# Altium PCB mini_plata.PcbDoc
Units mm, origin at the board's own origin, x right, y up, seen from the top; angles counter-clockwise.
Board outline 33 x 36 mm, 4 copper layers (Top Layer, Power, Ground, Bottom Layer), stack 1.486 mm thick; 73 components, 60 nets, 234 pads, 119 vias.
Unrouted connection lines stored in the file: 1.
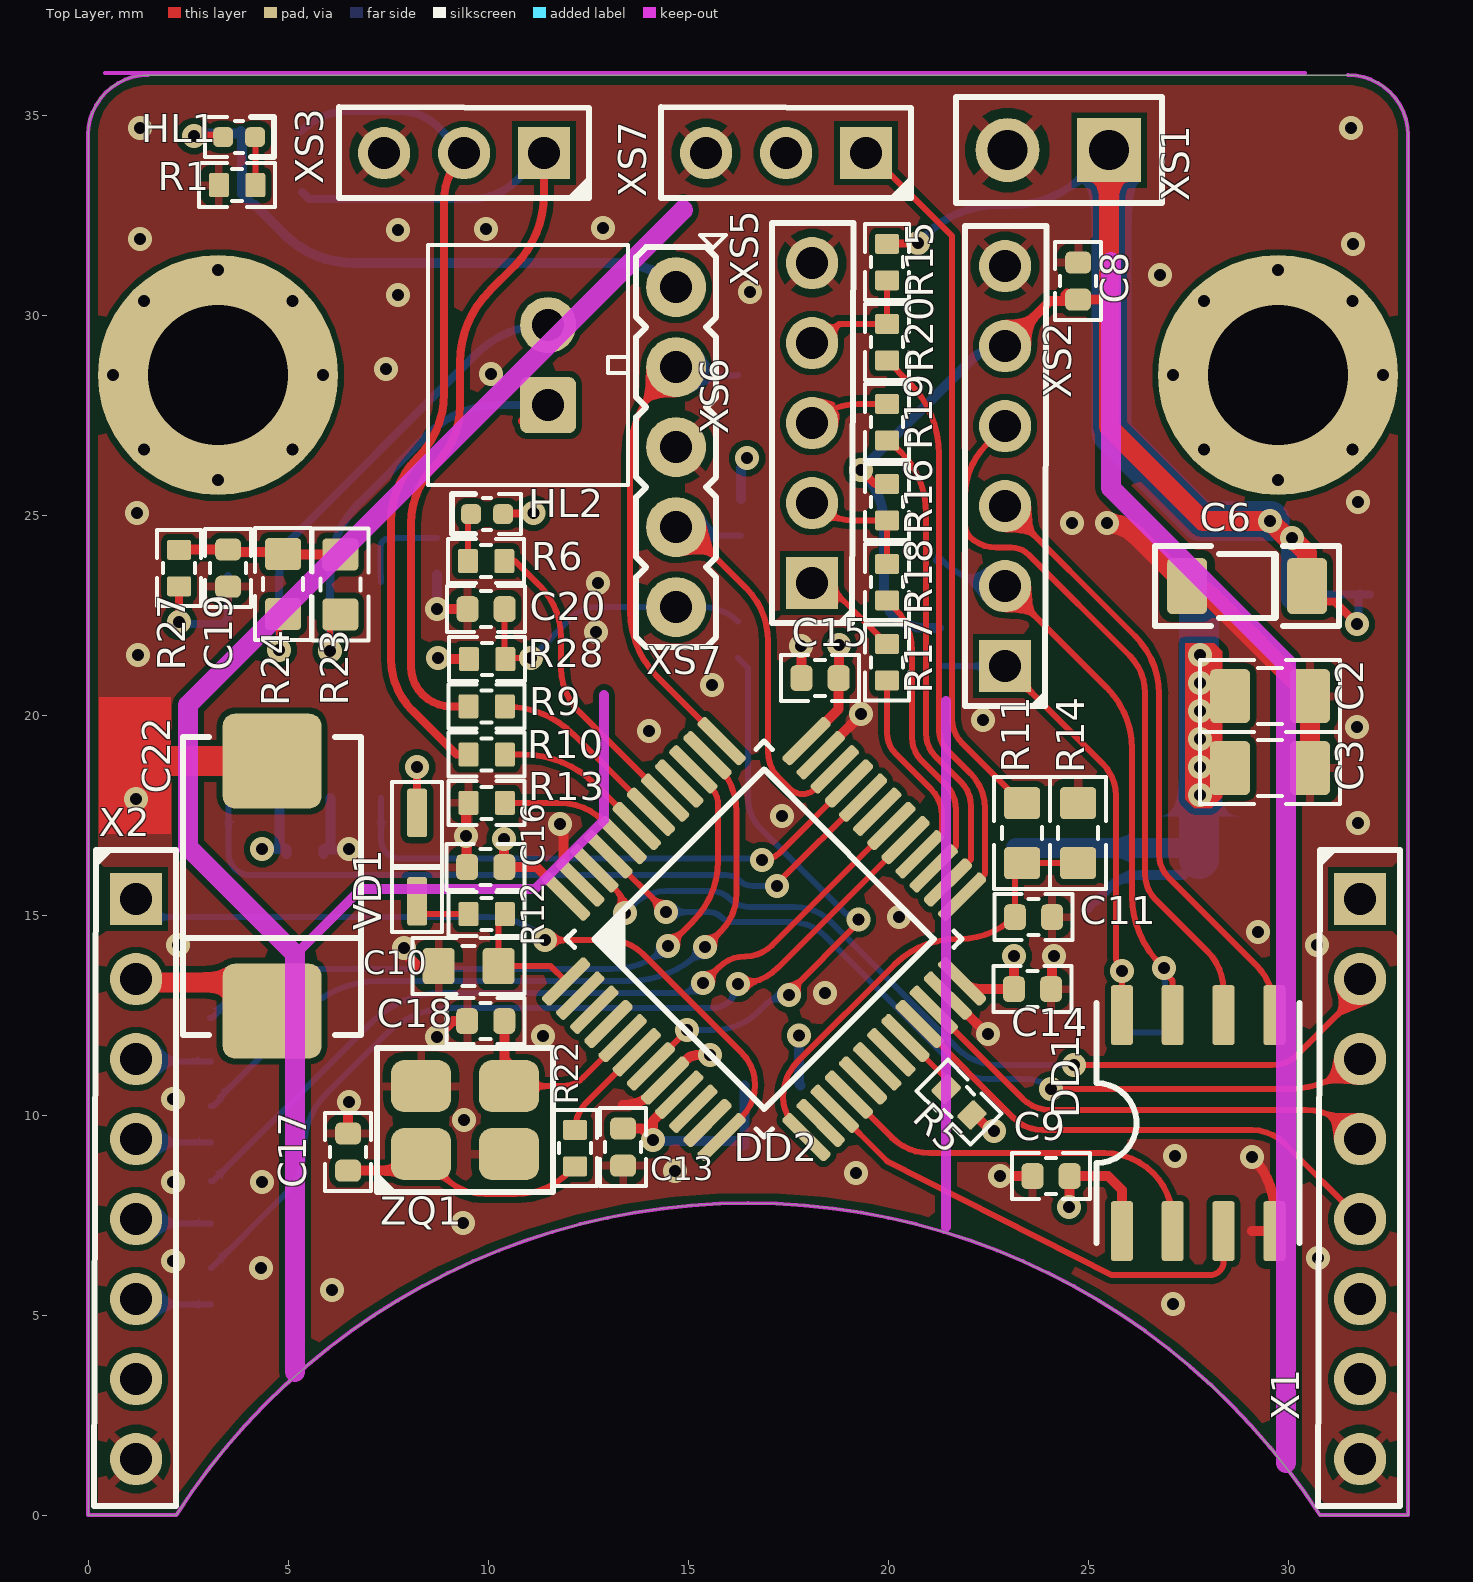
[diagram p0: Top Layer view]
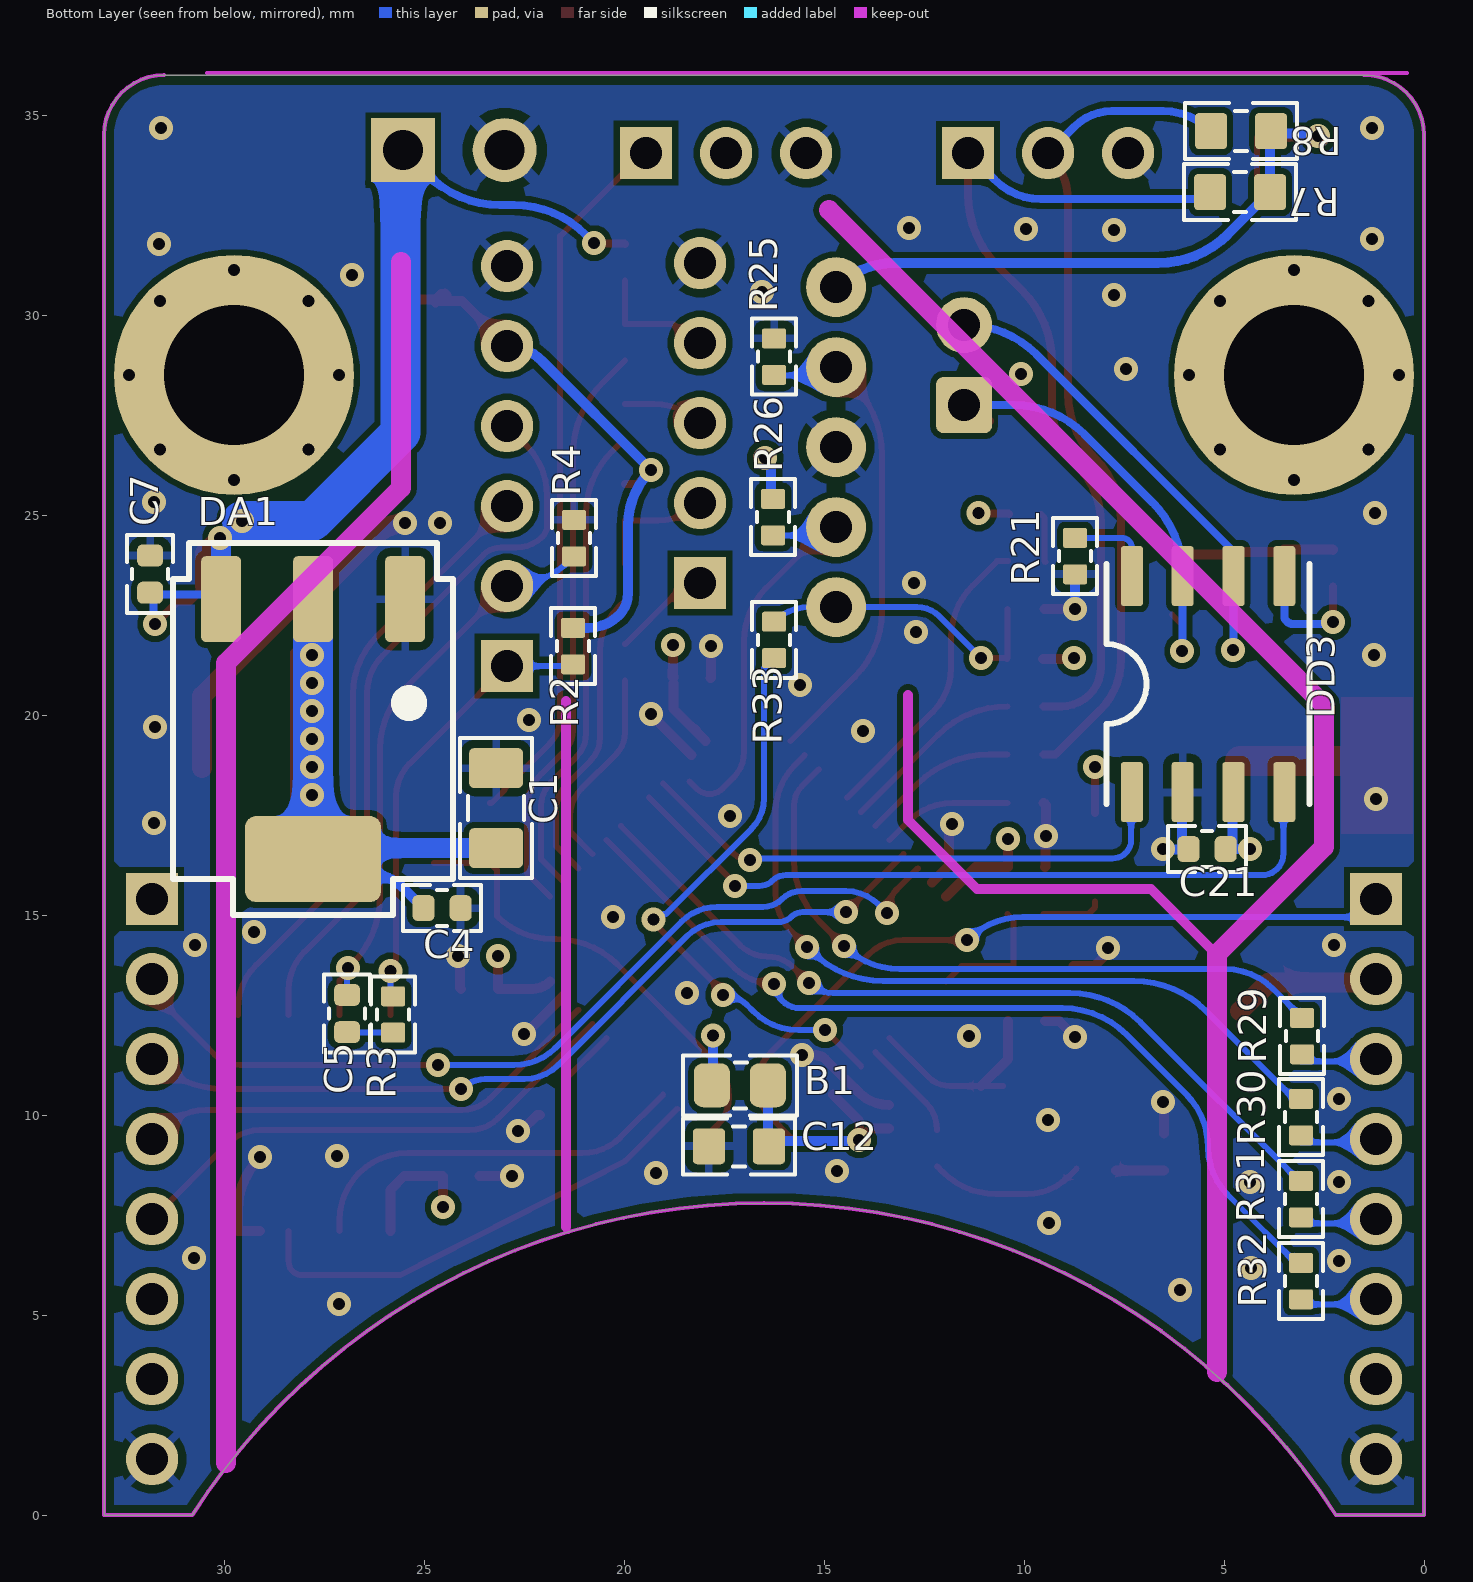
[diagram p1: Bottom Layer view, seen from below]
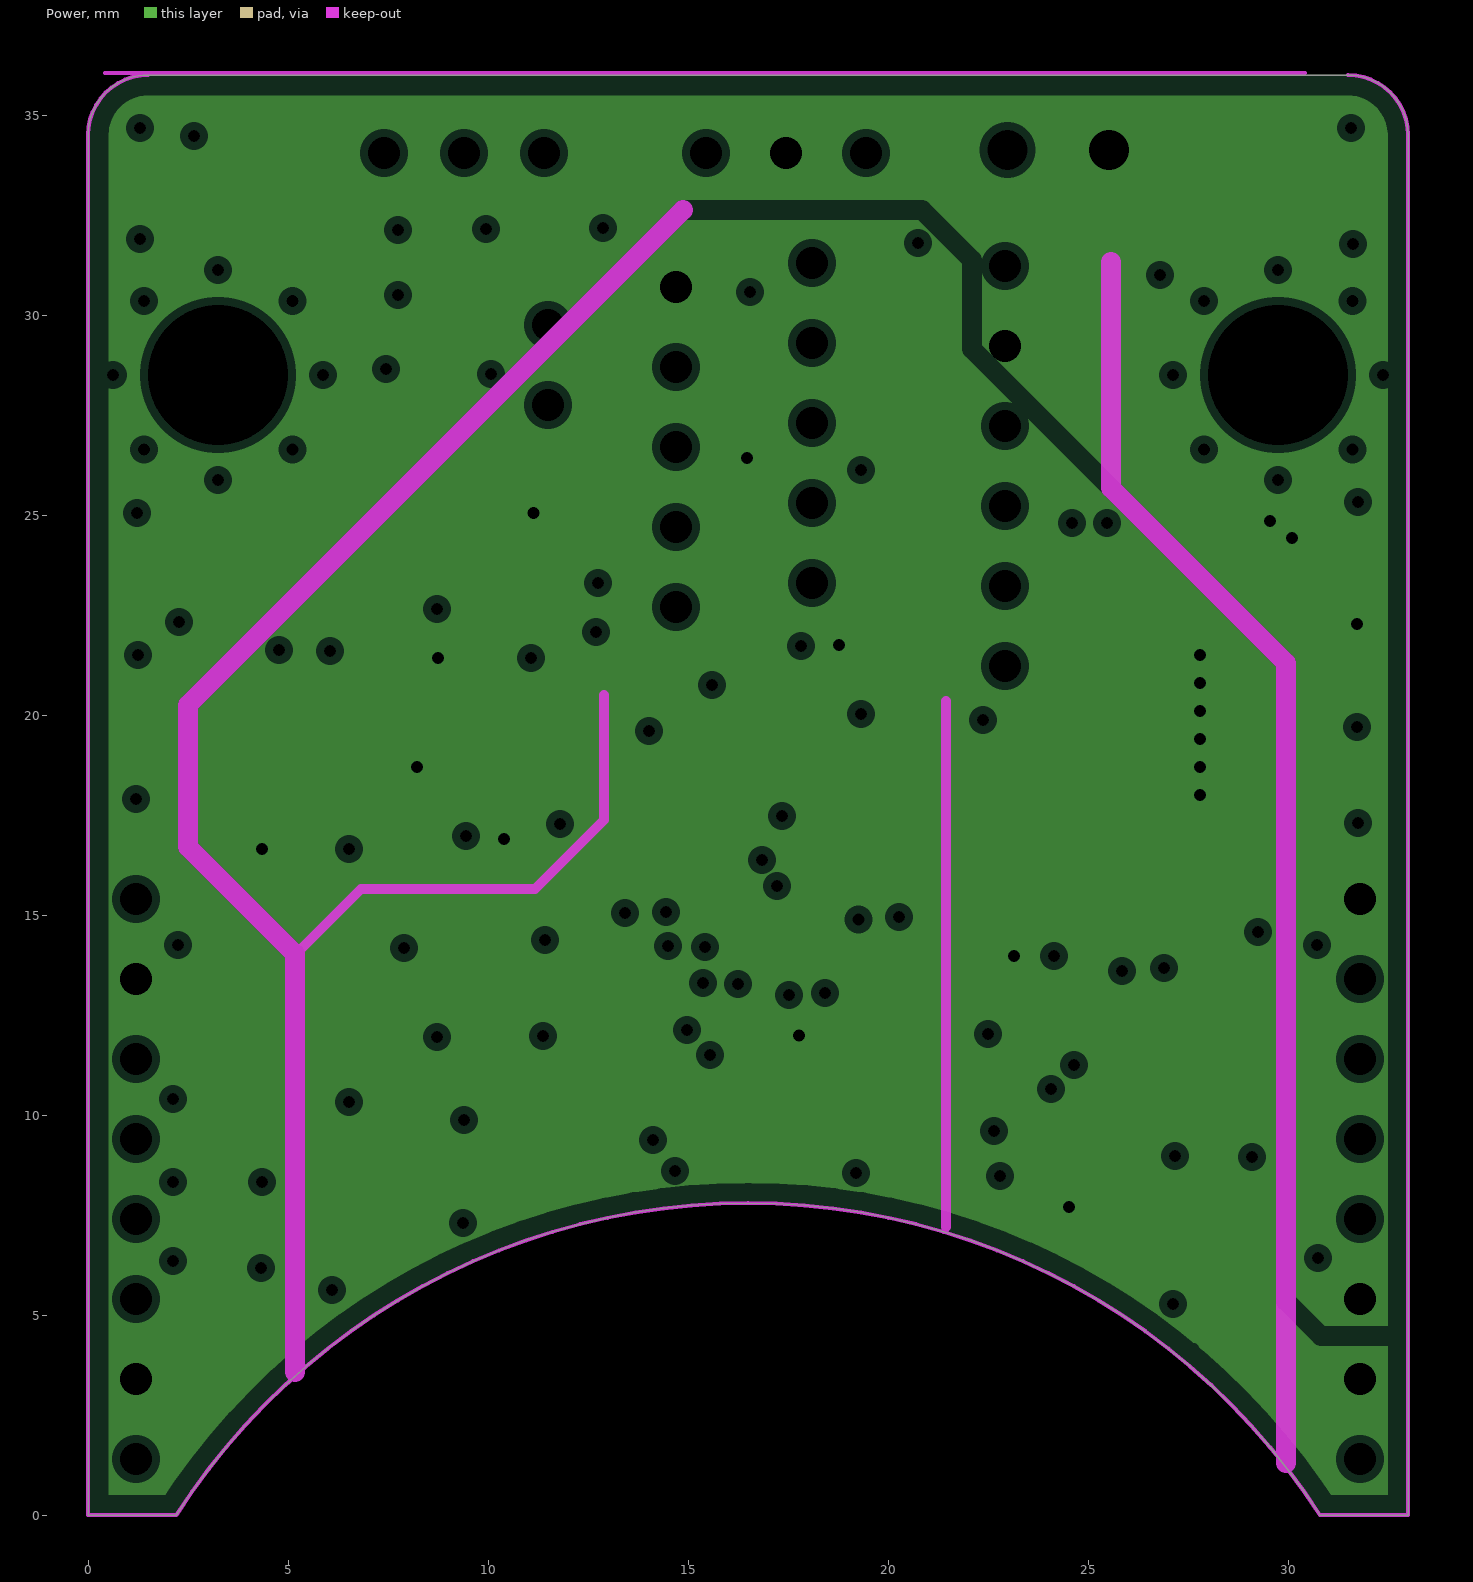
[diagram p2: Power, clearances drawn from the general rule]
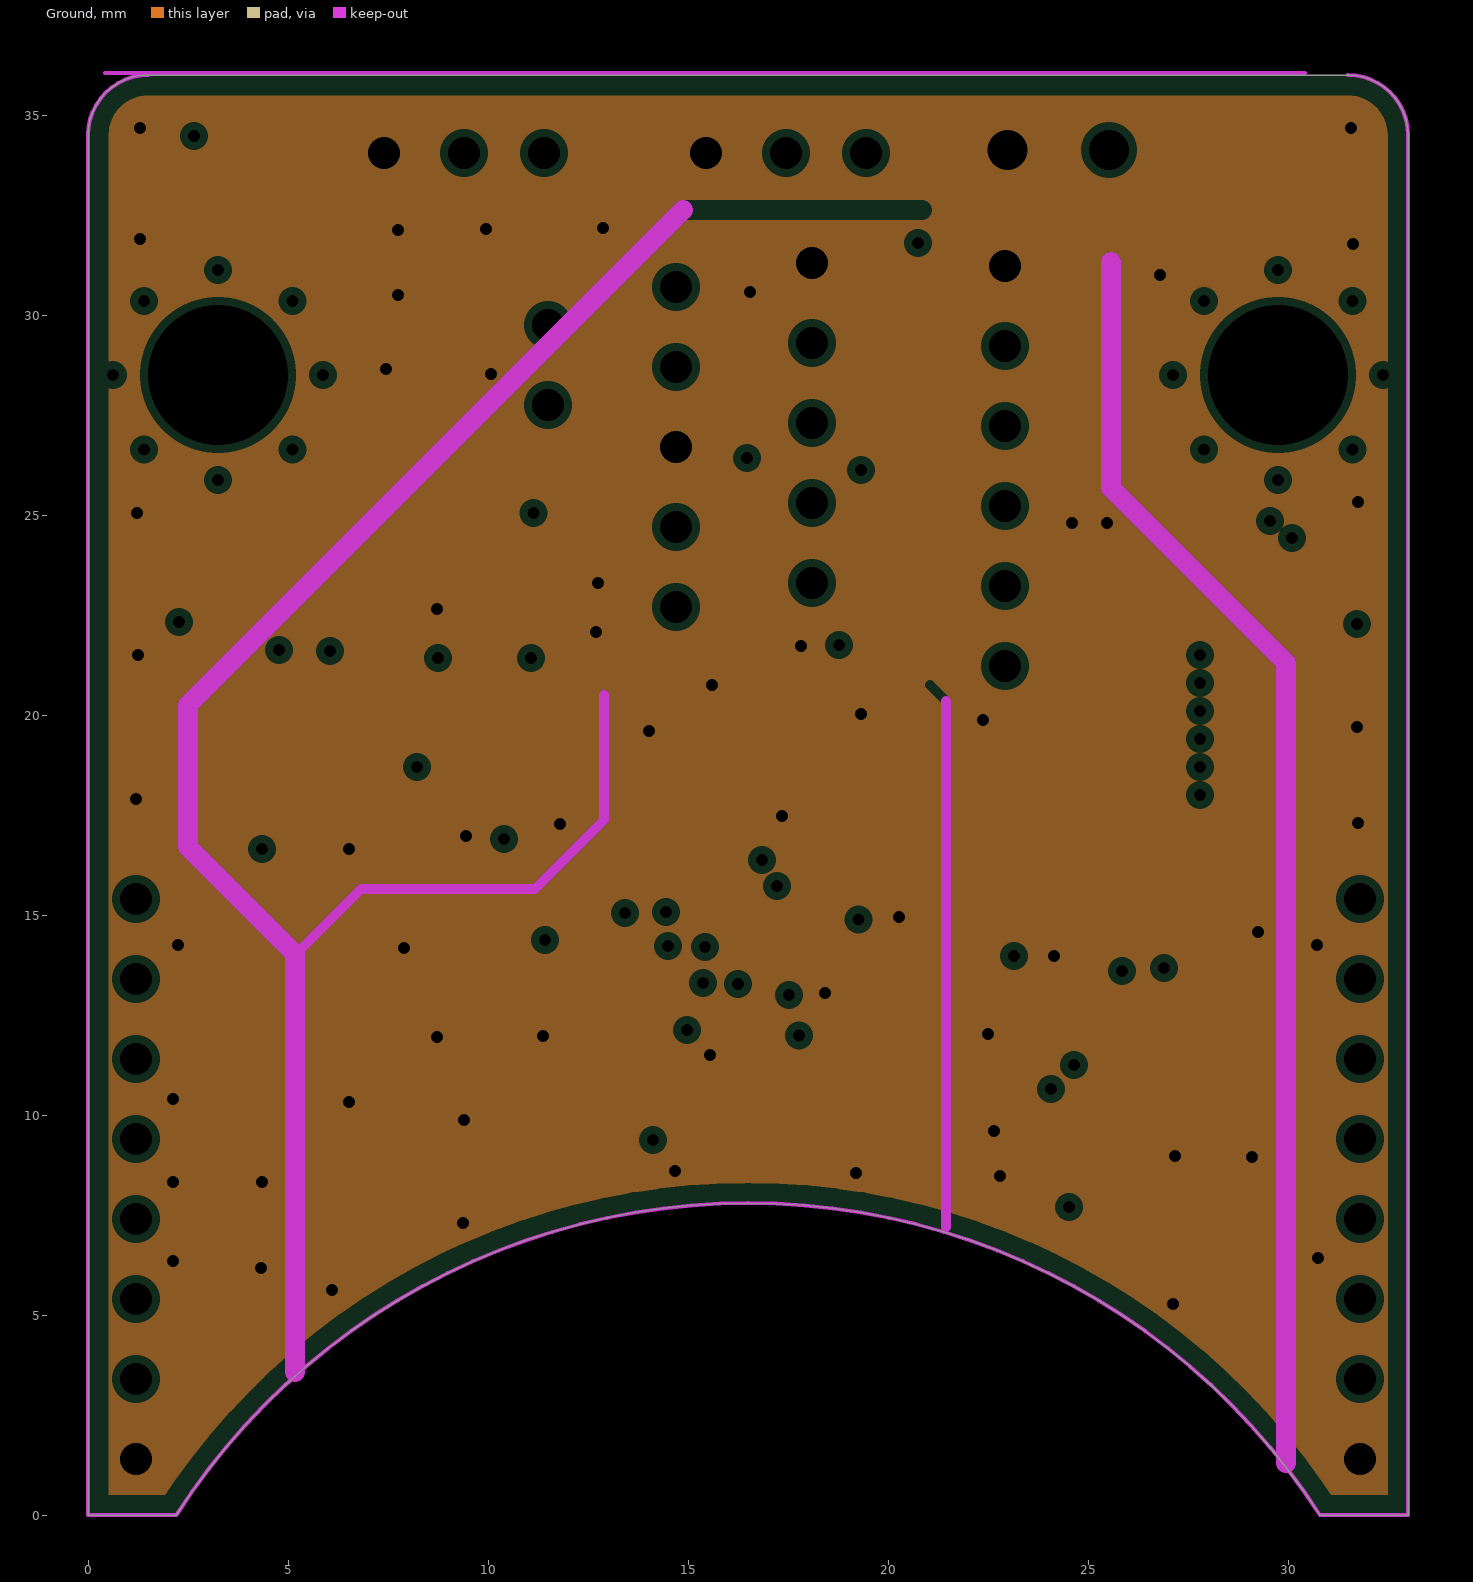
[diagram p3: Ground, clearances drawn from the general rule]
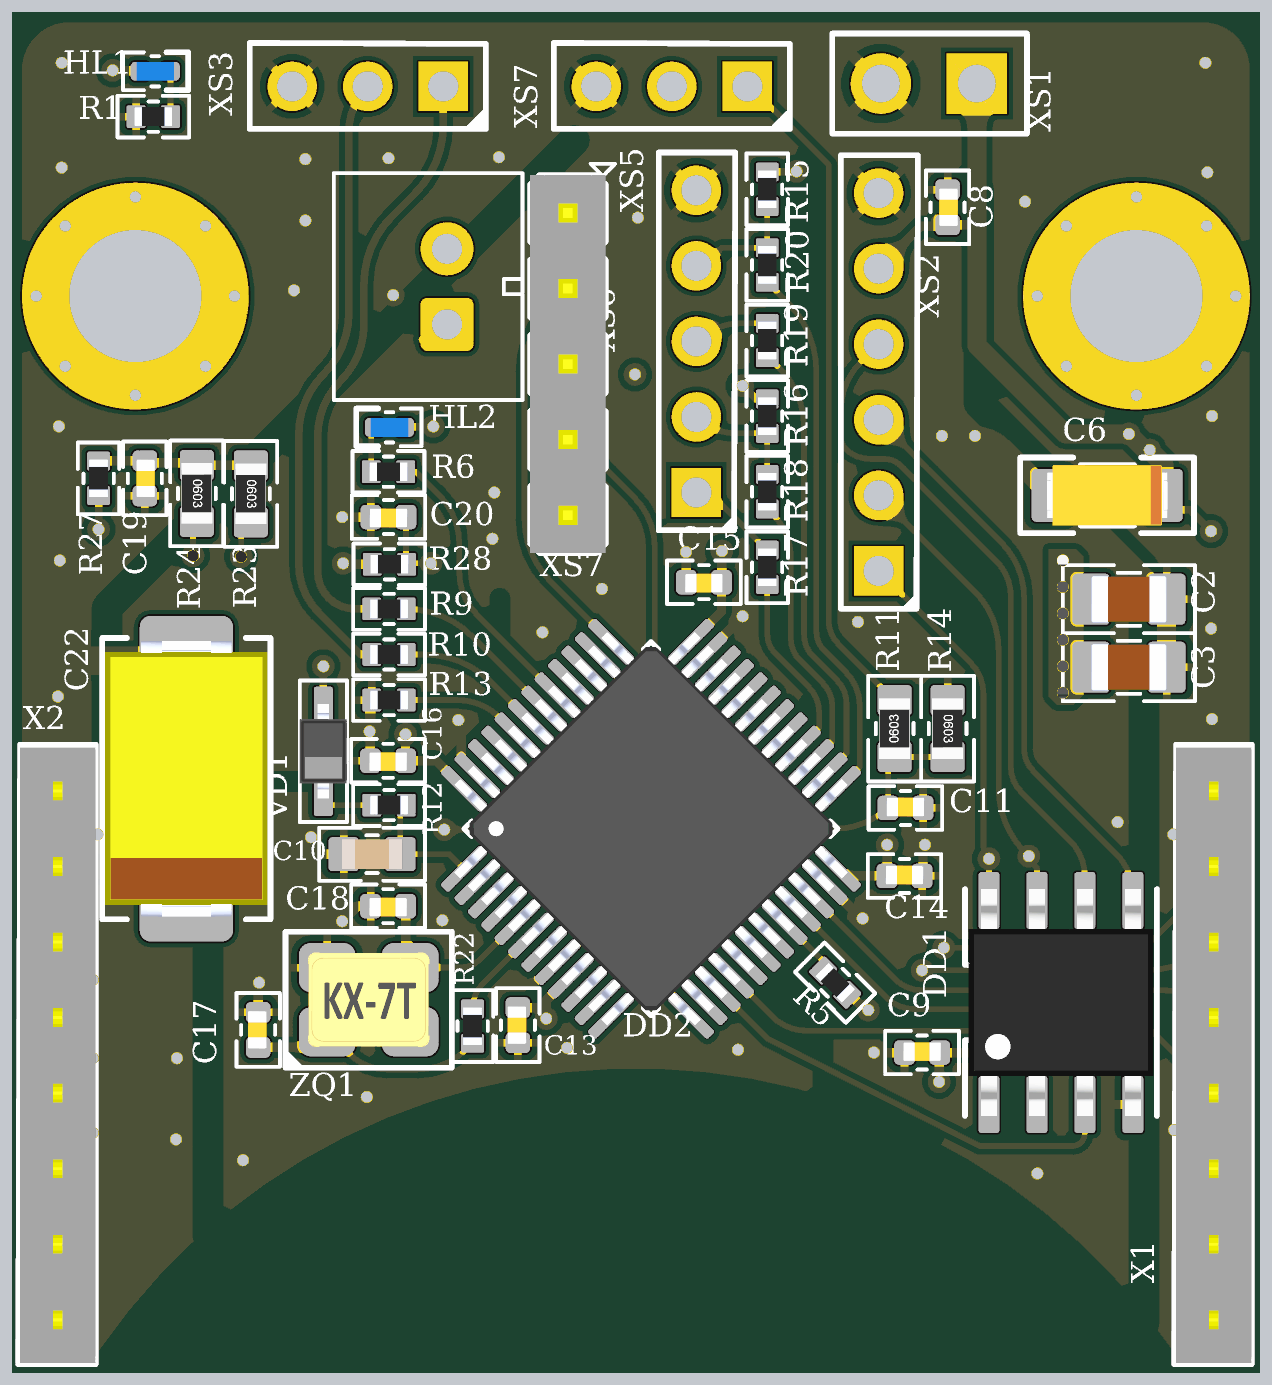
[diagram p4: 3D render of the assembled board from above, using the file's embedded part models]
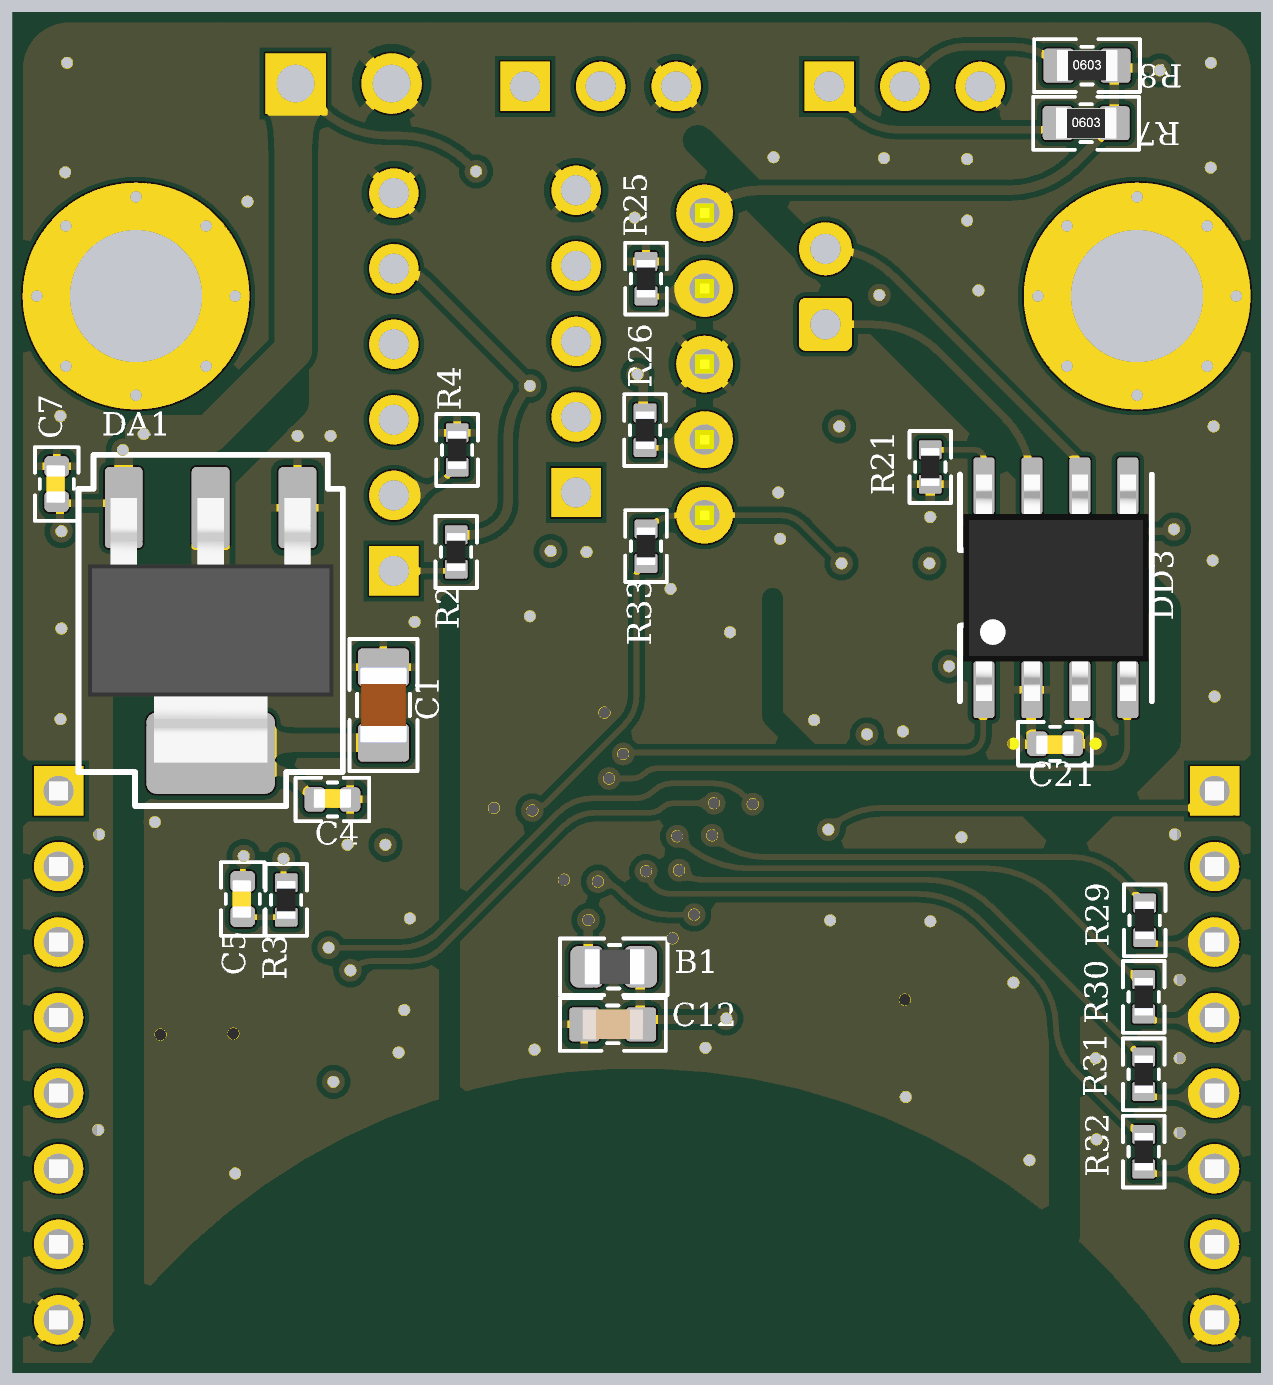
[diagram p5: 3D render of the assembled board from below, using the file's embedded part models]

## Layer stack, top to bottom
Top Solder: solder mask 0.01, Solder Resist, Dk 3.5
Top Layer: signal copper 0.018
Dielectric 2: prepreg 0.125, PP-006, Dk 4.1
Power: plane copper 0.018, net (Multiple Nets)
Dielectric 1: dielectric 1.164, FR-4, Dk 4.8
Ground: plane copper 0.018, net GND
Dielectric 3: prepreg 0.125, PP-006, Dk 4.1
Bottom Layer: signal copper 0.018
Bottom Solder: solder mask 0.01, Solder Resist, Dk 3.5

## Board outline
0,0 0,34.5 cw(c1.5,34.5) 1.5,36 31.5,36 cw(c31.5,34.5) 33,34.5 33,0 30.8,0 30.797,-0.002 ccw(c16.5,-9.2) 2.203,-0.002 2.2,0

## Design rules (kind name [scope] priority, off if disabled: settings)
AcuteAngle [All] p1: minimum=3.50000000000000E+0001 checktracksonly=FALSE
BoardOutlineClearance [All] p1: gap=0.25 ignorepadtopadclearanceinfootprint=FALSE except(0: Arc-SplitContinuation Track-SplitContinuation SMDPad-SplitContinuation THPad-SplitContinuation Via-SplitContinuation Fill-SplitContinuation Poly-SplitContinuation Region-SplitContinuation Text-SplitContinuation)
Clearance Clearance_KeepOutLayer [OnLayer('Keep-Out Layer') vs InNet('No Net')] p1: gap=0.25 ignorepadtopadclearanceinfootprint=FALSE
Clearance [All] p2: gap=0.15 ignorepadtopadclearanceinfootprint=FALSE except(0.2: Arc-Hole Track-Hole SMDPad-Hole THPad-Hole Via-Hole Fill-Hole Poly-Hole Region-Hole Text-Hole)
ComponentClearance [All] p1: gap=0.2 collisioncheckmode=3 verticalgap=0.2 showdistances=FALSE
HoleSize "HoleSize VIA" [IsVia] p1: absolutevalues=TRUE maxlimit=5.9 minlimit=0.3 maxpercent=80.000 minpercent=20.000
HoleSize [IsPad] p2: absolutevalues=TRUE maxlimit=5.9 minlimit=0.6 maxpercent=80.000 minpercent=20.000
HoleToHoleClearance [All] p1: gap=0.25 allowstackedmicrovias=TRUE
MinimumAnnularRing "MinimumAnnularRing VIA" [All] p1: minimumring=0.15
MinimumAnnularRing "MinimumAnnularRing PAD" [IsPAD] p2: minimumring=0.2
MinimumSolderMaskSliver [All] p1: minsoldermaskwidth=0.1
PlaneClearance [All] p1: clearance=0.2
PlaneConnect [All] p1: pad.planeconnectstyle=Relief pad.reliefexpansion=0.2 pad.reliefentries=4 pad.reliefconductorwidth=0.2 pad.reliefairgap=0.2 via.planeconnectstyle=Direct via.reliefexpansion=0.2 via.reliefentries=4 via.reliefconductorwidth=0.2 via.reliefairgap=0.2
PolygonConnect PolygonConnect_Via [IsVia] p1: connectstyle=Direct reliefconductorwidth=0.254 reliefentries=4 polygonreliefangle="90 Angle" airgapwidth=0.254
PolygonConnect [All] p2: thpad.connectstyle=Relief thpad.reliefconductorwidth=0.2 thpad.reliefentries=4 thpad.polygonreliefangle="45 Angle" thpad.airgapwidth=0.2 smdpad.connectstyle=Relief smdpad.reliefconductorwidth=0.2 smdpad.reliefentries=4 smdpad.polygonreliefangle="90 Angle" smdpad.airgapwidth=0.2 via.connectstyle=Direct via.reliefconductorwidth=0.25 via.reliefentries=4 via.polygonreliefangle="90 Angle" via.airgapwidth=0.25
RoutingVias [All] p1: holewidth=0.3 width=0.6 viastyle="Through Hole" minholewidth=0.2 minwidth=0.4 maxholewidth=5.9 maxwidth=6.4
SilkToSilkClearance [All] p1: silktosilkclearance=0
SilkToSolderMaskClearance [IsPad] p1: minsilkscreentomaskgap=0 clearancetoexposedcopper=TRUE
SolderMaskExpansion [All] p1: expansion=0.05 istentingtop=FALSE
Width [All] p1: maxlimit=5 minlimit=0.15 preferedwidth=0.15
22 further rules are at their usual default settings.

## Components (designator, comment, footprint, x,y, rotation, side; value= is the part's Value field where it differs from the comment)
B1 "BLM18PG181SN1D" Ferrite_Bead_0603 17.105,10.745 r180 bottom
C1 "22u" 0805_cap 23.2,17.675 r90 bottom
C2 "22u" 0805_cap 29.55,20.475 r0 top
C3 "10u" 0805_cap 29.55,18.675 r0 top
C4 "0.1u" 0402_CAP 24.55,15.175 r180 bottom
C5 "1.8n" 0402_CAP 26.925,12.54 r90 bottom
C6 "22Ux16V" "CASE A" 28.975,23.225 r180 top
C7 "0.1u" 0402_CAP 31.85,23.525 r90 bottom
C8 "2.2u" 0402_CAP 24.75,30.85 r270 top
C9 "0.1u" 0402_CAP 24.075,8.475 r0 top
C10 "2.2u" 0603_CAP 9.515,13.725 r180 top
C11 "0.1u" 0402_CAP 23.635,14.95 r0 top
C12 "4.7u" 0603_CAP 17.13,9.22 r180 bottom
C13 "0.1u" 0402_CAP 13.375,9.2 r90 top
C14 "0.1u" 0402_CAP 23.61,13.15 r0 top
C15 "0.1u" 0402_CAP 18.3,20.925 r180 top
C16 "0.1u" 0402_CAP 9.94,16.2 r180 top
C17 "18p" 0402_CAP 6.5,9.075 r90 top
C18 "18p" 0402_CAP 9.94,12.35 r180 top
C19 "4700p" 0402_CAP 3.5,23.675 r270 top
C20 "100n" 0402_CAP 9.95,22.65 r180 top
C21 "0.1u" 0402_CAP 5.425,16.65 r0 bottom
C22 "22x35" "CASE D" 4.6,15.725 r90 top
DA1 "1117M3-L-3-3" "SOT-223 (3)" 27.775,19.4 r270 bottom
DD1 "MAX3490EESA" SOIC-8 27.75,9.8 r90 top
DD2 "GD32F303C" LQFP-48 16.9,14.4 r45 top
DD3 "SN65HVD230DR" SOIC-8 5.4,20.775 r90 bottom
HL1 "Зелёный" 0402_LED_GREEN 3.775,34.45 r0 top
HL2 "Зелёный" 0402_LED_GREEN 9.975,25.025 r180 top
R1 "470" 0402_res 3.725,33.25 r0 top
R2 "5k1" 0402_res 21.275,21.725 r270 bottom
R3 "120" 0402_res 25.775,12.515 r90 bottom
R4 "5k1" 0402_res 21.25,24.425 r90 bottom
R5 "10k" 0402_res 21.775,10.325 r315 top
R6 "470" 0402_res 9.95,23.85 r180 top
R7 "2к2" 0603_RES 4.6,33.075 r180 bottom
R8 "2к2" 0603_RES 4.575,34.6 r180 bottom
R9 "22" 0402_res 9.965,20.219 r0 top
R10 "22" 0402_res 9.965,19.012 r0 top
R11 "18k" 0603_RES 23.35,17.05 r90 top
R12 "220" 0402_res 9.965,15.025 r180 top
R13 "10k" 0402_res 9.965,17.806 r180 top
R14 "10k" 0603_RES 24.75,17.05 r270 top
R15 "5k1" 0402_res 19.975,31.325 r90 top
R16 "5k1" 0402_res 19.975,25.322 r90 top
R17 "22" 0402_res 19.975,21.32 r90 top
R18 "22" 0402_res 19.975,23.321 r90 top
R19 "22" 0402_res 19.975,27.323 r90 top
R20 "22" 0402_res 19.975,29.324 r270 top
R21 "10k" 0402_res 8.725,23.975 r270 bottom
R22 "220" 0402_res 12.175,9.175 r90 top
R23 "62" 0603_RES 6.305,23.265 r270 top
R24 "62" 0603_RES 4.875,23.275 r270 top
R25 "10k" 0402_res 16.25,28.96 r90 bottom
R26 "10k" 0402_res 16.275,24.95 r90 bottom
R27 "0" 0402_res 2.275,23.675 r270 top
R28 "10k" 0402_res 9.975,21.4 r180 top
R29 "22" 0402_res 3.05,11.975 r90 bottom
R30 "22" 0402_res 3.075,9.95 r90 bottom
R31 "22" 0402_res 3.075,7.9 r90 bottom
R32 "22" 0402_res 3.075,5.85 r90 bottom
R33 "220" 0402_res 16.25,21.88 r90 bottom
VD1 "BAT60B" SOD-323 8.225,16.45 r90 top
X1 "PBD-8" PBD_8_2mm 31.8,8.4 r270 top
X2 "PBD-8" PBD_8_2mm 1.2,8.4 r270 top
XS1 "power_5v" "STEP_2.54mm 2X1" 25.525,34.125 r270 top
XS2 "SSI" PH6_2mm 22.925,24.225 r90 top
XS3 "I2C or UART" PH3_2mm 9.4,34.05 r180 top
XS5 "SPI" PH5_2mm 18.1,26.3 r90 top
XS6 "CAN" MW-2M 11.5,27.75 r90 top
XS7 "POT" PH3_2mm 17.45,34.05 r180 top
XS7 "SWD" jumper_5pin_step2mm 14.7,26.7 r270 top
ZQ1 "8Mhz" KX-7T 9.425,9.875 r0 top

## Footprints (in the part's own frame and the unit in brackets; to place one, negate y for a bottom-side part, rotate by r counter-clockwise, add the part's x,y. Pads: shape width x height; smd on the part's side, far side on the other; paste and mask are expansions set on the pad)
0402_CAP [mm]
  rrect50% 0.55x0.65 smd: 1(-0.465,0) 2(0.465,0)
  silkscreen extent -0.97,-0.58 0.97,0.58, body extent -0.5,-0.22 0.5,0.28, height 0.5
0402_LED_GREEN [mm]
  rrect50% 0.5x0.5 smd: A(-0.4,0) K(0.4,0)
  silkscreen extent -0.85,-0.5 0.87,0.5, body extent -0.5,-0.25 0.5,0.25, height 0.4
0402_res [mm]
  rrect20% 0.5x0.6 smd: 1(-0.455,0) 2(0.455,0)
  silkscreen extent -0.95,-0.55 0.95,0.55, body extent -0.5,-0.25 0.5,0.25, height 0.35
0603_CAP [mm]
  rrect25% 0.8x0.9 smd: 1(-0.75,0) 2(0.75,0)
  silkscreen extent -1.4,-0.7 1.4,0.7, body extent -0.8,-0.4 0.8,0.4, height 0.8
0603_RES [mm]
  rrect25% 0.8x0.9 smd: 1(-0.75,0) 2(0.75,0)
  silkscreen extent -1.4,-0.7 1.4,0.7, body extent -0.8,-0.41 0.8,0.41, height 0.45
0805_cap [mm]
  rrect25% 1x1.35 smd: 1(-1,0) 2(1,0)
  silkscreen extent -1.75,-0.9 1.75,0.9, body extent -1,-0.62 1,0.63, height 1.45
"CASE A" [mm]
  rrect25% 1x1.4 smd: 1(-1.5,0) 2(1.5,0)
  silkscreen extent -2.3,-1 2.3,1, body extent -1.6,-0.8 1.6,0.8, height 1.6
"CASE D" [mm]
  rrect25% 2.37x2.47 smd: 1(-3.125,0) 2(3.125,0)
  silkscreen extent -3.72,-2.22 3.72,2.22, body extent -3.65,-2.15 3.65,2.15, height 3.1
Ferrite_Bead_0603 [mm]
  rrect50% 0.9x1.1 smd: 1(-0.7,0) 2(0.7,0)
  silkscreen extent -1.43,-0.75 1.43,0.75, body extent -0.77,-0.48 0.83,0.48, height 0.8
jumper_5pin_step2mm [mm]
  round 1.5 hole 0.8: 1(-4,0) 2(-2,0) 3(0,0) 4(2,0) 5(4,0)
  silkscreen extent -5,-1 5,1, body extent -5,-1 5,1, height 5.21
KX-7T [mm]
  rrect50% 1.5x1.3 smd: 1(-1.1,-0.85) 2(1.1,0.85) 3(-1.1,0.85) 3(1.1,-0.85)
  silkscreen extent -2.2,-1.8 2.2,1.8, body extent -1.61,-1.25 1.61,1.25, height 0.81
LQFP-48 [mm]
  rrect50% 1.5x0.3 smd mask+0.025: 1(-4.25,2.75) 2(-4.25,2.25) 3(-4.25,1.75) 4(-4.25,1.25) 5(-4.25,0.75) 6(-4.25,0.25) 7(-4.25,-0.25) 8(-4.25,-0.75) 9(-4.25,-1.25) 10(-4.25,-1.75) 11(-4.25,-2.25) 12(-4.25,-2.75) 25(4.25,-2.75) 26(4.25,-2.25) 27(4.25,-1.75) 28(4.25,-1.25) 29(4.25,-0.75) 30(4.25,-0.25) 31(4.25,0.25) 32(4.25,0.75) 33(4.25,1.25) 34(4.25,1.75) 35(4.25,2.25) 36(4.25,2.75)
  rrect50% 0.3x1.5 smd mask+0.025: 13(-2.75,-4.25) 14(-2.25,-4.25) 15(-1.75,-4.25) 16(-1.25,-4.25) 17(-0.75,-4.25) 18(-0.25,-4.25) 19(0.25,-4.25) 20(0.75,-4.25) 21(1.25,-4.25) 22(1.75,-4.25) 23(2.25,-4.25) 24(2.75,-4.25) 37(2.75,4.25) 38(2.25,4.25) 39(1.75,4.25) 40(1.25,4.25) 41(0.75,4.25) 42(0.25,4.25) 43(-0.25,4.25) 44(-0.75,4.25) 45(-1.25,4.25) 46(-1.75,4.25) 47(-2.25,4.25) 48(-2.75,4.25)
  silkscreen extent -3.5,-3.5 3.5,3.5, body extent -4.5,-4.5 4.5,4.5, height 1.6
MW-2M [mm]
  rrect25% 1.4x1.4 hole 0.8: 1(0,0)
  round 1.4 hole 0.8: 2(2,0)
  silkscreen extent -2,-2 4,3, body extent -2,-2 4,3, height 6
PBD_8_2mm [mm]
  rect 1.308x1.308 / inner round 1.308 / far side rect 1.308x1.308 hole 0.8: 1(-7,0)
  round 1.308 hole 0.8: 2(-5,0) 3(-3,0) 4(-1,0) 5(1,0) 6(3,0) 7(5,0) 8(7,0)
  silkscreen extent -8.23,-1.05 8.18,1, body extent -8.15,-1 8.15,1, height 6.35
PH3_2mm [mm]
  rect 1.308x1.308 / inner round 1.308 / far side rect 1.308x1.308 hole 0.8: 1(-2,0)
  round 1.308 hole 0.8: 2(0,0) 3(2,0)
  silkscreen extent -3.13,-1.15 3.13,1.13
PH5_2mm [mm]
  rect 1.308x1.308 / inner round 1.308 / far side rect 1.308x1.308 hole 0.8: 1(-3,0)
  round 1.308 hole 0.8: 2(-1,0) 3(1,0) 4(3,0) 5(5,0)
  silkscreen extent -4,-1.03 6,1
PH6_2mm [mm]
  rect 1.308x1.308 / inner round 1.308 / far side rect 1.308x1.308 hole 0.8: 1(-3,0)
  round 1.308 hole 0.8: 2(-1,0) 3(1,0) 4(3,0) 5(5,0) 6(7,0)
  silkscreen extent -4,-1.04 8,1
SOD-323 [mm]
  rrect25% 1.21x0.5 smd: A(1.105,0) K(-1.105,0)
  silkscreen extent -1.88,-0.63 1.88,0.63, body extent -1.25,-0.63 1.25,0.63, height 1.1
SOIC-8 [mm]
  rrect25% 1.5x0.55 smd: 1(-2.7,1.905) 2(-2.7,0.635) 3(-2.7,-0.635) 4(-2.7,-1.905) 5(2.7,-1.905) 6(2.7,-0.635) 7(2.7,0.635) 8(2.7,1.905)
  silkscreen extent -3,-2.54 3,2.54, body extent -3,-2.45 3,2.45, height 1.75
"SOT-223 (3)" [mm]
  rrect25% 2.15x1 smd: 1(-3.5,2.3) 2(-3.5,0) 3(-3.5,-2.3)
  rrect25% 2.15x3.4 smd: 2(3,0)
  silkscreen extent -4.9,-3.5 4.4,3.5, body extent -3.75,-3.25 3.25,3.25, height 1.64
"STEP_2.54mm 2X1" [mm]
  rect 1.6x1.6 hole 1: 1(0,0)
  round 1.6 hole 1: 2(0,-2.54)
  silkscreen extent -1.33,-3.83 1.33,1.33

## Part data
B1: library part "Ferrite Bead"
C1 C2 C3: library part Capacitor, Case=0805, ValueType=Конденсатор
C4 C5 C7 C8 C9 C11 C13 C14 C15 C16 C17 C18 C19 C20 C21: library part Capacitor, Case=0402, ValueType=Конденсатор
C6: library part Capacitor_pol, Case=TYPE(A), ValueType=Конденсатор
C10 C12: library part Capacitor, Case=0603, ValueType=Конденсатор
C22: library part Capacitor_pol, ValueType=Конденсатор
DD1: ValueManufacturer="Analog Devices", ComponentLink1Description=chipdip, ComponentLink1URL=https://www.chipdip.ru/product0/8002979238?ysclid=m3rd7su6kb974072814, NomenclatureNumber=8002979238
DD2: Case=LQFP-48, ValueDescription=Микроконтроллер, ValueManufacturer="Giga Device", ValueManufacturerPartNumber=GD32F303C, ValueType=Микроконтроллер
HL1 HL2: library part Led_green, Case=0603, Temp=-40°C...+85°C, ValueDescription=Светодиод, ValueManufacturer=Foryard, ValueManufacturerPartNumber=fyls-0603ugc, ValueType=Светодиод
R1 R6 R12 R17 R18 R19: library part Resistor, Power=0402, ValueType=Резистор
R2 R3 R4 R5 R9 R10 R13 R15 R16 R20 R21 R22 R25 R26 R27 R28 R29 R30 R31 R32 R33: library part Resistor, Case=0402, ValueType=Резистор
R7 R8 R11 R14 R23 R24: library part Resistor, Case=0603, ValueType=Резистор
VD1: library part DiodeSch_BAT60B, ValueManufacturer="NXP Semiconductors", ValueManufacturerPartNumber=BAT254
X1 X2: library part Connecor_8pin, Parameter 1=GND, System=Connector
  X1: Parameter 2=+3.3V, Parameter 3=+5V, Parameter 4=A_IN, Parameter 5=B_IN, Parameter 6=A_OUT, Parameter 7=B_OUT, Parameter 8=+5V
  X2: Parameter 2=+5V, Parameter 3=IN1, Parameter 4=IN2, Parameter 5=ENC_A, Parameter 6=ENC_B, Parameter 7=+5V, Parameter 8=AN_ASC
XS6: library part power_5v
XS7: library part "I2C or UART"
XS7: library part swd_JUMPER_5pin
ZQ1: library part Quartz, ValueType="Кварцевый резонатор"

## Free pads (board coordinates)
  round 6 hole 3.5 unplated: ""(3.25,28.5) ""(29.75,28.5)

## Via types
v1: diameter 0.6, hole 0.3, Top Layer to Bottom Layer, tented both sides, 103 vias
v2: diameter 0.7/0.7 (per signal layer), hole 0.3, Top Layer to Bottom Layer, tented both sides, 16 vias

## Nets (pads, with @x,y where several pads share a name; then routed paths per layer and width w, separated by ;. In a path a pad name is that pad's centre, name@x,y a point inside that pad or via, vN(x,y) a via of type N, cw(c..) or ccw(c..) an arc to the next point about the centre after c; other vN are vias at no path point)
3V3: B1.1 C1.1 C2.1 C3.1 C4.1 C9.2 C14.1 C15.1 C16.1 C21.1 DA1.2 DD1.1 DD2.24 DD2.36 DD2.48 DD3.3 HL1.A HL2.A R7.2 R8.2 R26.2 R28.2 VD1.A X1.7 XS7.1@14.7,30.7 | length 48.5
  Top Layer w0.2: VD1.A v1(8.225,18.7) ; HL2.A 10.388,25.037 11.123,25.037 v1(11.135,25.05)
  Top Layer w0.25: v1(2.65,34.475) 2.663,34.462 3.362,34.462 HL1.A ; v1(8.75,21.425) 8.775,21.4 R28.2 R28.2@9.522,21.398 ; v1(10.4,16.9) 10.4,16.205 C16.1 11.211,16.2 DD2.48 ; v1(16.475,26.425) v1@16.488,26.412 ; DD2.36@18.211,19.635 18.211,19.6 DD2.36 18.765,20.154 C15.1@18.765,20.793 ; C15.1@18.765,20.968 C15.1 18.775,20.935 v1(18.775,21.75) C15.1@18.775,21.125 ; C15.1@18.79,20.968 C15.1@18.79,21.125 ; DD2.24 ccw(c22.295,13.784) 22.295,13.155 23.15,13.155 v1(23.15,13.975) ; v1(24.525,7.7) 24.532,7.708 24.532,8.468 C9.2 25.5,8.475 25.845,8.13 DD1.1
  Bottom Layer w0.25: v1(2.65,34.475) 2.712,34.538 3.762,34.538 R8.2 ; R8.2@3.85,34.575 R7.2 3.85,33.025 4.125,32.75 4.175,32.75 4.9,32.025 ccw(c6.65,33.775) 6.65,31.3 13.251,31.3 cw(c13.251,29.251) 14.449,30.913 cw(c13.251,29.251) XS7.1@14.7,30.7 ; v1(4.35,16.65) C21.1 ; DD3.3@4.785,17.925 4.785,16.757 4.96,16.582 C21.1@4.96,16.525 ; R26.2@16.325,25.405 16.325,26.18 16.475,26.33 v1(16.475,26.425) ; v1(17.775,11.985) 17.775,10.817 ccw(c17.876,10.817) B1.1 ; C4.1 25.015,15.218 25.164,15.367 25.207,15.367 25.527,15.687 ; 25.527,15.687 cw(c26.298,14.915) 26.298,16.006 27.381,16.006 27.775,16.4 DA1.2@27.5,16.675
  Bottom Layer w0.5: C1.1 DA1.2@27.5,16.675
  Bottom Layer w1: DA1.2@27.775,16.4 DA1.2@27.775,22.9
  other v1: 27.8,18 27.8,18.7 27.8,19.4 27.8,20.1 27.8,20.8 27.8,21.5
+5V: C6.1 C7.1 C8.2 C22.1 DA1.3 R2.1 R15.2 R16.2 X1.1 X1.6 X2.2 X2.7 XS1.1 XS2.5 XS7.2@17.45,34.05 | length 58.9
  Top Layer w0.2: v1(19.325,26.125) 19.673,25.777 R16.2 ; R15.2 19.985,31.79 20.74,31.79 v1(20.75,31.8) ; C6.1 30.858,22.842 31.158,22.842 v1(31.725,22.275)
  Top Layer w0.25: XS2.5 24.05,30.35 C8.2@24.715,30.35 ; C8.2@24.44,30.5 24.475,30.535 24.483,30.527 24.573,30.527 24.75,30.35 C8.2@24.713,30.313 ; C8.2 25.49,30.385 25.525,30.35
  Top Layer w0.5: X2.2 1.281,13.319 3.881,13.319 C22.1 ; XS1.1 25.525,30.35 25.525,27.2 27.875,24.85 v1(29.548,24.85) 29.954,24.444 30.081,24.444 v1(30.1,24.425) 30.475,24.05 C6.1
  Bottom Layer w0.2: XS7.2@17.425,34.175 XS7.2@17.425,34.2 ; v1(20.75,31.8) 20.956,32.006 cw(c22.752,30.21) 22.752,32.75 23.098,32.75 ccw(c23.098,35.29) XS1.1@24.755,33.365 ; XS1.1@25.52,34.13 XS1.1@24.755,33.365 ; XS1.1 24.894,33.494 cw(c23.098,35.29) XS1.1@24.755,33.365 ; DA1.3 30.185,23.01 C7.1@31.775,23.01 ; DA1.3@30.1,23.475 v1(30.1,24.425) ; v1(31.725,22.275) 31.762,22.313 31.762,22.998 C7.1@31.775,23.01 ; C7.1@31.8,23.035 C7.1@31.775,23.01 ; C7.1@32.05,23.01 C7.1@31.775,23.01
  Bottom Layer w0.25: R2.1 20.898,22.18 cw(c20.898,23.273) 20.125,22.5 cw(c20.668,23.043) 19.9,23.043 19.9,24.737 ccw(c17.937,24.737) v1(19.325,26.125) 22.071,28.871 ; 22.072,28.872 cw(c22.925,28.018) 22.256,29.023 cw(c22.925,28.018) XS2.5
  Bottom Layer w0.5: v1(29.548,24.85) v1@30.075,24.323 ; DA1.3 v1@30.075,24.323 ; v1@30.081,24.379 30.075,24.373 v1@30.075,24.323
  Bottom Layer w1: XS1.1@25.59,34.125 25.59,27.06 27.8,24.85 v1(29.548,24.85)
AN_ACS: DD2.12 X2.1 | length 19.1
  Top Layer w0.15: v1(11.425,14.375) 13.025,14.375 cw(c13.025,13.168) 13.878,14.022 16.343,11.557 cw(c15.541,10.755) 16.675,10.755 cw(c15.541,10.755) 16.343,9.954 DD2.12
  Bottom Layer w0.15: X2.1 1.65,14.95 10.037,14.95 cw(c10.037,12.987) v1(11.425,14.375)
CLK: DD2.37 R25.1 XS7.2@14.7,28.7 | length 12.1
  Top Layer w0.15: 14.231,20.958 cw(c15.879,22.604) 13.55,22.604 13.55,26.498 cw(c16.09,26.498) 13.781,27.556 cw(c16.09,26.498) 14.294,28.294 XS7.2@14.7,28.7 ; 14.232,20.957 DD2.37
  Bottom Layer w0.15: XS7.2@14.7,28.475 14.715,28.49 16.235,28.49 R25.1
DIO: DD2.34 R26.1 XS7.4 | length 10.3
  Top Layer w0.15: XS7.4 14.925,24.7 16.452,23.173 cw(c15.129,21.85) 17,21.85 17,19.084 ccw(c17.926,19.084) 17.271,18.429 ; 17.271,18.429 17.542,18.158 ccw(c17.863,18.478) 17.863,18.025 ccw(c17.863,18.478) 18.183,18.158 DD2.34@18.359,18.334
  Bottom Layer w0.15: XS7.4@14.7,24.475 14.71,24.485 16.315,24.485 R26.1@16.325,24.495
ENC_A: DD2.38 R30.2 | length 19.1
  Top Layer w0.15: v1(15.425,14.2) 15.819,14.594 ; DD2.38 15.724,18.758 cw(c14.541,17.575) 16.214,17.575 16.214,15.547 cw(c14.867,15.547) 15.82,14.595
  Bottom Layer w0.15: R30.2@3.075,10.225 3.125,10.225 3.3,10.4 3.3,10.45 5.456,12.606 cw(c7.252,10.81) 7.252,13.35 13.523,13.35 ccw(c13.523,15.89) 15.319,14.094 v1(15.425,14.2)
ENC_B: DD2.39 R29.2 | length 17.1
  Top Layer w0.15: v1(14.5,14.225) 15.125,14.85 ccw(c13.616,16.359) 15.75,16.359 15.75,17.75 ccw(c15.086,17.75) 15.556,18.219 DD2.39
  Bottom Layer w0.15: R29.2 3.1,12.43 3.275,12.605 3.275,12.655 3.772,13.152 cw(c4.974,11.951) 4.974,13.65 13.112,13.65 ccw(c13.112,15.613) v1(14.5,14.225)
GND: C1.2 C2.2 C3.2 C4.2 C6.2 C7.2 C8.1 C9.1 C10.2 C11.2 C12.1 C13.1 C14.2 C15.2 C16.2 C17.2 C18.2 C19.2 C20.2 C21.2 DA1.1 DD1.4 DD2.8 DD2.23 DD2.35 DD2.47 DD3.2 R1.1 R4.2 R5.2 R13.2 R14.1 R21.2 R25.2 X1.8 X2.8 XS1.2 XS2.6 XS3.3 XS5.5 XS7.3 ZQ1.3 | length 29.7
  Top Layer w0.25: C17.2 6.5,10.3 v1(6.525,10.325) ; v1(7.9,14.175) 7.9,14.08 7.99,13.99 7.99,13.975 8.24,13.725 C10.2 ; v1(8.725,11.95) 9.125,12.35 C18.2 ; v1(8.725,22.65) C20.2 ; C16.2 9.463,16.213 9.463,16.962 v1(9.45,16.975) 9.45,17.746 R13.2 ; v1(11.8,17.275) 11.8,17.18 11.88,17.101 11.88,16.238 DD2.47 ; 13.375,10.25 ccw(c13.375,11.302) 14.119,10.558 DD2.8 ccw(c14.425,10.899) 14.45,10.875 14.975,11.4 cw(c15.216,11.159) 15.216,11.5 v1(15.55,11.5) ; v1(17.825,21.725) 17.831,21.719 17.831,20.929 C15.2 ; DD2.35 19.001,19.683 19.004,19.683 19.325,20.004 v1(19.325,20.025) ; DD2.23 21.512,12.986 22.473,12.025 v1(22.5,12.025) ; R5.2 22.172,10.003 22.575,9.6 v1(22.65,9.6) ; v1(22.8,8.475) C9.1 ; C14.2 24.099,13.174 24.099,13.924 v1(24.15,13.975) ; 29.1,7.1 DD1.4 29.655,7.61 ccw(c27.76,7.61) v1(29.1,8.95)
  Top Layer w0.5: v1(25.475,24.8) cw(c25.475,23.774) 26.201,24.499 C6.2 cw(c27.475,22.44) 28.03,22.995 C2.2 C3.2
  Bottom Layer w0.25: C21.2@5.89,16.525 5.89,16.582 6.055,16.747 DD3.2@6.055,17.925 ; C21.2 5.903,16.638 6.513,16.638 v1(6.525,16.65) ; v1(8.725,22.65) R21.2
  other v1: 27.125,5.275 6.1,5.625 4.325,6.175 2.125,6.35 30.75,6.425 9.375,7.3 2.125,8.325 4.35,8.325 19.2,8.55 14.675,8.6 27.175,8.975 9.4,9.875 2.125,10.4 11.375,11.975 18.425,13.05 2.25,14.25 30.725,14.25 29.25,14.575 20.275,14.95 31.75,17.3 17.35,17.475 1.2,17.9 14.025,19.6 31.725,19.7 22.375,19.875 15.6,20.75 1.25,21.5 12.7,22.075 12.75,23.3 24.6,24.8 1.225,25.05 31.75,25.325 10.075,28.525 7.45,28.65 7.75,30.5 16.55,30.575 26.8,31 31.625,31.775 1.3,31.9 7.75,32.125 9.95,32.15 12.875,32.175 1.3,34.675 31.575,34.675
GNDP: C22.2 | length 3.7
  Top Layer w0.75: 1.225,19.525 1.225,19.475 1.85,18.85 C22.2
I2C_SCL/USART_TX: DD2.42 R9.2 | length 4.6
  Top Layer w0.15: R9.2 cw(c10.42,17.769) 12.152,19.501 DD2.42
I2C_SDA/USART_RX: DD2.43 R10.2 | length 3.9
  Top Layer w0.15: R10.2 10.882,19.012 cw(c10.882,16.472) 12.678,18.268 DD2.43
IN1: DD2.29 R32.2 | length 22.4
  Top Layer w0.15: v1(16.25,13.275) ccw(c16.25,14.689) 17.25,13.689 DD2.29
  Bottom Layer w0.15: R32.2@3.075,6.175 4.914,8.014 ccw(c3.74,9.188) 5.4,9.188 cw(c7.301,9.188) 5.957,10.532 7.433,12.008 cw(c9.044,10.396) 9.044,12.675 15.35,12.675 15.606,12.675 ccw(c15.606,13.296) 16.045,12.857 16.087,12.899 v1(16.25,13.275)
IN2: DD2.30 R31.2 | length 20.5
  Top Layer w0.15: v1(15.375,13.3) 15.769,13.694 cw(c16.434,13.03) 16.434,13.969 ccw(c16.434,14.909) 17.098,14.245 DD2.30
  Bottom Layer w0.15: R31.2 3.125,8.355 7.092,12.322 ; 7.093,12.323 cw(c8.85,10.563) 8.85,13.05 14.771,13.05 ccw(c14.771,13.904) 15.225,13.181 ccw(c14.771,13.904) v1(15.375,13.3)
M\C\L\R\: DD2.7 R33.1 | length 14.5
  Top Layer w0.15: DD2.7 14.072,11.22 v1(14.975,12.125) v1(14.975,12.125) ; v1(17.525,13) 17.525,13.075 19.259,14.809 v1(19.259,14.884)
  Bottom Layer w0.15: v1(14.975,12.125) 15.637,12.125 ccw(c15.637,13.724) 16.768,12.593 16.928,12.753 cw(c17.525,12.155) 17.321,12.975 cw(c17.525,12.155) v1(17.525,13) ; R33.1 16.5,21.175 16.5,17.917 ccw(c17.567,17.917) 16.813,17.163 18.954,15.021 18.999,15.021 19.137,14.884 v1(19.259,14.884)
NetB1_2: B1.2 C12.2 C13.2 DD2.9 | length 6.1
  Top Layer w0.25: C13.2 13.835,9.665 v1(14.125,9.375) 14.125,9.857 DD2.9
  Bottom Layer w0.25: v1(14.125,9.375) 14.15,9.35 16.3,9.35 16.405,9.245 B1.2
NetC5_1: C5.1 R3.1 | length 1.2
  Bottom Layer w0.15: R3.1 C5.1@26.91,12.06 ; C5.1@26.935,12.185 C5.1@26.95,12.2
NetC5_2: C5.2 DD1.7 R4.1 XS2.2 | length 14.7
  Top Layer w0.15: XS2.2 25.464,20.686 cw(c23.927,19.15) 26.1,19.15 26.1,15.475 ccw(c28.514,15.475) 26.541,14.084 ccw(c28.514,15.475) 26.807,13.768 v1(26.9,13.675) ; v1@26.95,13.675 26.95,13.525 27.115,13.36 DD1.7
  Bottom Layer w0.15: R4.1@21.2,23.87 R4.1@21.225,23.845 ; R4.1 21.337,23.883 ccw(c22.925,25.47) 21.475,23.756 ccw(c22.925,25.47) XS2.2 ; v1(26.9,13.675) 26.925,13.65 26.925,13.155 C5.2@26.95,13.13
NetC10_1: C10.1 DD2.1 R12.1 | length 3.2
  Top Layer w0.15: R12.1 10.265,14.87 C10.1 11.565,13.725 DD2.1
NetC17_1: C17.1 R22.1 ZQ1.1 | length 5.1
  Top Layer w0.15: ZQ1.1@8.688,8.662 8.901,8.449 ccw(c9.925,9.474) 8.902,8.448 ccw(c9.925,9.474) 9.925,8.025 10.703,8.025 ccw(c10.703,9.902) 12.03,8.575 R22.1
  Top Layer w0.25: C17.1 ZQ1.1@7.702,8.61
NetC18_1: C18.1 DD2.5 ZQ1.2 | length 5.2
  Top Layer w0.15: ZQ1.2 11.075,10.725 11.85,10.725 ccw(c11.85,11.484) 12.387,10.947 DD2.5
  Top Layer w0.25: C18.1 10.405,11.396 11.075,10.726 ZQ1.2@11.075,10.725
NetC19_1: C19.1 R23.1 R24.1 R27.1 | length 4.1
  Top Layer w0.25: R27.1 2.28,24.135 3.495,24.135 C19.1 3.557,24.082 4.817,24.082 R24.1 4.88,24.02 6.3,24.02 R23.1
NetC20_1: C20.1 R28.1 R33.2 XS7.5 | length 7.7
  Top Layer w0.15: C20.1 10.415,21.415 R28.1 10.455,21.425 v1(11.075,21.425)
  Bottom Layer w0.15: v1(11.075,21.425) 12.12,22.47 cw(c12.675,21.915) 12.675,22.7 XS7.5 15.369,22.7 cw(c15.369,21.454) 16.025,22.513 cw(c15.369,21.454) R33.2
NetDD1_5: DD1.5 XS2.3 | length 15.3
  Top Layer w0.15: XS2.3 26.174,21.976 ; 26.174,21.976 cw(c24.723,20.525) 26.775,20.525 26.775,16.511 ccw(c27.586,16.511) 27.012,15.938 29.2,13.75 cw(c28.102,12.652) 29.655,12.652 DD1.5
NetDD1_6: DD1.6 XS2.4 | length 18.1
  Top Layer w0.15: 22.037,24.463 cw(c22.309,24.734) 21.925,24.734 21.925,25.48 cw(c23.724,25.48) 22.451,26.751 ; 22.038,24.462 ccw(c22.701,25.126) 22.701,24.187 23.09,24.187 cw(c23.09,23.59) 23.512,24.013 26.036,21.489 cw(c25.097,20.55) 26.425,20.55 26.425,16.021 ccw(c27.321,16.021) 26.688,15.387 27.987,14.088 cw(c27.028,13.128) 28.385,13.128 DD1.6 ; 22.452,26.752 XS2.4
NetDD1_8: DD1.8 R2.2 R3.2 XS2.1 | length 12.1
  Top Layer w0.15: XS2.1 25.363,18.788 ; 25.363,18.787 cw(c24.548,17.973) 25.7,17.973 25.7,13.955 ccw(c26.195,13.955) 25.709,13.863 ccw(c26.195,13.955) v1(25.845,13.605) DD1.8
  Bottom Layer w0.15: R2.2@21.27,21.275 R2.2 21.32,21.225 XS2.1 ; R3.2@25.8,13.095 25.845,13.14 v1(25.845,13.605)
NetDD2_6: DD2.6 R22.2 | length 2.5
  Top Layer w0.15: R22.2 cw(c13.137,9.63) 12.457,10.31 DD2.6
NetDD2_20: DD2.20 R5.1 | length 1.7
  Top Layer w0.15: DD2.20 21.46,10.901 21.46,10.653 R5.1
NetDD2_41: DD2.41 R6.1 | length 7.6
  Top Layer w0.15: R6.1 10.675,23.85 11.287,23.238 ; 11.288,23.237 cw(c9.99,21.94) 11.825,21.94 11.825,21.18 ccw(c13.38,21.18) 12.28,20.081 ; 12.28,20.08 DD2.41
NetDD2_44: DD2.44 R13.1 | length 3.3
  Top Layer w0.15: R13.1 11.775,17.806 cw(c11.775,16.216) 12.899,17.341 DD2.44
NetDD3_5: DD3.5 R27.2 | length 3.2
  Top Layer w0.2: v1(2.275,22.325) R27.2
  Bottom Layer w0.2: v1(2.275,22.325) 2.325,22.275 3.275,22.275 ccw(c3.275,22.495) 3.495,22.495 DD3.5
NetDD3_6: DD3.6 R24.2 XS6.2 | length 12.5
  Top Layer w0.15: v1(4.775,21.625) 4.775,22.425 R24.2
  Bottom Layer w0.2: DD3.6 4.77,23.47 4.77,21.63 v1(4.775,21.625) ; DD3.6@4.785,23.325 4.785,24.11 9.7,29.025 ; 9.701,29.026 cw(c11.45,27.275) 11.45,29.75 XS6.2
NetDD3_7: DD3.7 R23.2 XS6.1 | length 11.4
  Top Layer w0.15: v1(6.05,21.6) 6.05,22.26 R23.2
  Top Layer w0.25: XS6.1@10.875,27.35 XS6.1@11.125,27.6
  Bottom Layer w0.2: v1(6.05,21.6) 6.042,21.608 6.042,23.467 DD3.7 6.035,23.508 cw(c8.575,23.508) DD3.7@6.055,23.826 ; DD3.7@6.055,23.325 DD3.7@6.055,23.826 ; 8.5,27.025 6.779,25.304 ccw(c8.575,23.508) DD3.7@6.055,23.826 ; 8.501,27.026 cw(c10.25,25.275) 10.25,27.75 XS6.1
NetDD3_8: DD3.8 R21.1 | length 2.4
  Bottom Layer w0.15: DD3.8 7.305,24.18 cw(c7.555,24.18) 7.555,24.43 R21.1 ; DD3.8@7.325,23.325 DD3.8@7.325,23.475
NetHL1_K: HL1.K R1.2 | length 1.2
  Top Layer w0.15: R1.2 HL1.K@4.18,34.445
NetHL2_K: HL2.K R6.2 | length 1.2
  Top Layer w0.15: R6.2@9.47,23.825 R6.2 9.495,24.945 HL2.K
NetR7_1: R7.1 R9.1 XS3.1 | length 22.3
  Top Layer w0.2: 8.366,20.509 cw(c9.067,21.211) 8.075,21.211 8.075,24.784 cw(c10.166,24.784) 8.687,26.262 ; 8.366,20.509 ccw(c9.067,21.211) 9.067,20.219 R9.1 ; 8.688,26.263 ccw(c7.209,27.741) 9.3,27.741 9.3,28.815 cw(c11.84,28.815) 10.044,30.611 10.656,31.223 ccw(c8.86,33.019) 11.4,33.019 XS3.1
  Bottom Layer w0.2: R7.1 5.525,32.9 9.575,32.9 ccw(c9.575,34.53) 10.727,33.377 XS3.1
NetR8_1: R8.1 R10.1 XS3.2 | length 21
  Top Layer w0.2: 8.237,26.437 ccw(c9.837,24.838) 7.575,24.838 7.575,21.392 ccw(c9.367,21.392) 8.099,20.126 ccw(c9.367,21.392) 8.1,20.125 9.213,19.012 R10.1 ; 8.238,26.438 ccw(c6.638,28.037) 8.9,28.037 8.9,32.843 cw(c10.607,32.843) 9.152,33.736 cw(c10.607,32.843) XS3.2
  Bottom Layer w0.2: R8.1 cw(c6.532,33.393) 6.532,35.1 7.8,35.1 cw(c7.8,33.772) 8.739,34.711 XS3.2
NetR11_2: R11.2 XS7.1@19.45,34.05 | length 17.9
  Top Layer w0.15: XS7.1@19.487,34.087 21.6,31.975 21.6,19.904 ccw(c22.454,19.904) 21.85,19.3 22.99,18.16 22.99,18.123 23.314,17.8 R11.2
NetR12_2: R12.2 VD1.K | length 1.5
  Top Layer w0.15: VD1.K 8.225,15.2 8.4,15.025 R12.2
NetR15_1: R15.1 R20.1 XS5.4 | length 3.1
  Top Layer w0.15: XS5.4@18.245,29.28 18.225,29.3 18.298,29.3 18.777,29.779 R20.1 R15.1
NetR16_1: R16.1 R18.2 XS5.2 | length 3.1
  Top Layer w0.15: XS5.2 ccw(c19.145,26.345) 18.776,24.914 ccw(c19.145,26.345) 19.145,24.867 R16.1 R18.2
NetR17_2: R17.2 XS5.1 | length 2.5
  Top Layer w0.15: XS5.1 cw(c18.1,22.455) 18.236,23.289 cw(c18.1,22.455) 18.697,23.053 R17.2
NetR19_2: R19.2 XS5.3 | length 2
  Top Layer w0.15: XS5.3 cw(c19.254,26.146) 18.67,27.67 cw(c19.254,26.146) 19.254,27.778 R19.2
NetR29_1: R29.1 X2.3 | length 1.9
  Bottom Layer w0.15: X2.3 1.255,11.345 R29.1@3.075,11.345
NetR30_1: R30.1 X2.4 | length 1.9
  Bottom Layer w0.15: X2.4 1.285,9.315 R30.1@3.075,9.315
NetR31_1: R31.1 X2.5 | length 1.9
  Bottom Layer w0.15: X2.5 1.31,7.29 R31.1@3.075,7.29
NetR32_1: R32.1 X2.6 | length 1.9
  Bottom Layer w0.15: X2.6 1.335,5.265 R32.1@3.075,5.265
pot: C11.1 DD2.13 R11.1 R14.2 | length 11.7
  Top Layer w0.15: 17.746,11.346 ccw(c18.642,10.45) 17.375,10.45 ccw(c18.375,10.45) 17.668,9.743 DD2.13 ; 17.746,11.346 20.164,13.764 ; 20.164,13.764 cw(c21.7,12.227) 21.7,14.4 21.787,14.4 ccw(c21.787,16.363) 23.175,14.975 23.175,16.125 R11.1 R14.2
RX(CAN): DD2.32 DD3.4 | length 18.6
  Top Layer w0.15: v1(17.228,15.729) cw(c17.373,15.729) 17.27,15.831 DD2.32
  Bottom Layer w0.15: DD3.4@3.515,17.925 3.515,16.535 ccw(c4.05,16.535) 4.05,16 15.958,16 cw(c15.958,15.537) 16.285,15.865 ; 16.286,15.864 ccw(c16.613,16.192) 16.613,15.729 v1(17.228,15.729)
SPI_MISO: DD2.27 R18.1 | length 7.5
  Top Layer w0.15: R18.1 20.147,22.694 cw(c19.052,21.6) 20.6,21.6 20.6,19.436 ccw(c21.411,19.436) 20.837,18.863 21.438,18.263 ; DD2.27 21.7,16.725 21.7,17.629 ccw(c20.804,17.629) 21.438,18.262
SPI_MOSI: DD2.28 R17.1 | length 5.1
  Top Layer w0.15: R17.1 19.975,19.551 ccw(c20.701,19.551) 20.188,19.038 21.07,18.155 cw(c20.393,17.479) 21.35,17.479 21.35,17.082 DD2.28
SPI_SCLK: DD2.26 R19.1 | length 12
  Top Layer w0.15: R19.1@20.025,26.868 20.319,26.574 cw(c18.794,25.05) 20.569,26.274 cw(c18.794,25.05) 20.95,25.05 20.95,19.536 ccw(c21.761,19.536) 21.187,18.963 21.825,18.325 cw(c21.221,17.721) 22.075,17.721 22.075,16.393 DD2.26
SPI_SS: DD2.25 R20.2 | length 14.5
  Top Layer w0.15: R20.2 20.531,28.313 cw(c18.735,26.517) 21.275,26.517 21.275,19.608 ccw(c21.958,19.608) 21.475,19.125 22.062,18.538 ; DD2.25 22.425,16.036 22.425,17.662 ccw(c21.187,17.662) 22.063,18.537
SSI_MISO: DD1.2 DD2.16 | length 9.9
  Top Layer w0.15: DD2.16 20.091,9.441 ccw(c21.035,10.385) 21.035,9.05 25.418,9.05 cw(c25.418,7.343) 26.624,8.551 ; 26.626,8.549 cw(c25.442,7.367) 27.115,7.367 DD1.2
SSI_SCK: DD1.3 DD2.15 | length 11.9
  Top Layer w0.15: DD2.15 19.961,8.865 19.977,8.848 25.6,6 28.05,6 ccw(c28.05,6.335) 28.385,6.335 DD1.3
TTL_A_IN_GPIO: DD2.21 X1.5 | length 12.9
  Top Layer w0.15: DD2.21 23.146,9.921 ccw(c23.862,10.637) 23.862,9.625 29.1,9.625 cw(c29.1,8.478) 29.911,9.289 X1.5
TTL_A_OUT_GPIO: DD2.45 X1.3 | length 21.3
  Top Layer w0.15: DD2.45 14.45,15.082 v1(14.45,15.075) ; v1(24.075,10.65) 30,10.65 ccw(c30,13.185) X1.3@31.792,11.392 ; X1.3@31.792,11.392 X1.3
  Bottom Layer w0.15: v1(14.45,15.075) 15.541,15.075 cw(c15.541,14.691) 15.813,14.962 ccw(c16.144,15.294) 16.144,14.825 17.575,14.825 cw(c17.575,13.618) 18.429,14.471 21.65,11.25 ; 21.65,11.25 ccw(c22.495,12.095) 22.495,10.9 23.471,10.9 cw(c23.471,10.046) 23.925,10.769 cw(c23.471,10.046) v1(24.075,10.65)
TTL_B_IN_GPIO: DD2.22 X1.4 | length 11.9
  Top Layer w0.15: DD2.22 23.362,10.412 ccw(c24.056,11.106) 24.056,10.125 30.45,10.125 cw(c30.45,8.616) X1.4@31.516,9.684 ; X1.4@31.517,9.683 X1.4
TTL_B_OUT_GPIO: DD2.46 X1.2 | length 23
  Top Layer w0.15: DD2.46 DD2.46@13.177,15.648 ; DD2.46@13.178,15.647 cw(c12.58,15.05) 13.4,15.254 cw(c12.58,15.05) v1(13.425,15.05) ; v1(24.65,11.25) 29.226,11.25 29.6,11.25 ccw(c29.6,12.154) 30.24,11.515 30.505,11.78 31.925,13.2 X1.2@32.15,13.2 ; X1.2@31.8,13.087 X1.2
  Bottom Layer w0.15: v1(13.425,15.05) 13.639,15.264 cw(c14.45,14.453) 14.45,15.6 15.57,15.6 cw(c15.57,14.924) 16.048,15.402 ccw(c16.526,15.88) 16.526,15.204 17.675,15.204 cw(c17.675,13.946) 18.565,14.835 21.725,11.675 ; 21.725,11.675 ccw(c22.751,12.701) 22.751,11.25 v1(24.65,11.25)
TX(CAN): DD2.33 DD3.1 | length 13.8
  Top Layer w0.15: v1(16.854,16.379) ccw(c16.854,17) 16.991,16.394 ccw(c16.854,17) 17.267,16.536 ccw(c16.854,17) 17.292,16.56 ; 17.293,16.561 DD2.33
  Bottom Layer w0.15: DD3.1@7.325,17.925 7.325,16.875 ccw(c7.784,16.875) 7.784,16.416 16.816,16.416 v1(16.854,16.379)
pads on no net: DD2.2 DD2.3 DD2.4 DD2.10 DD2.11 DD2.14 DD2.17 DD2.18 DD2.19 DD2.31 DD2.40
copper on no net:
  other v2: 3.25,25.875 29.75,25.875 1.394,26.644 5.106,26.644 27.894,26.644 31.606,26.644 0.625,28.5 5.875,28.5 27.125,28.5 32.375,28.5 1.394,30.356 5.106,30.356 27.894,30.356 31.606,30.356 3.25,31.125 29.75,31.125

## Polygon pours and split planes (outlines as drawn)
GND on Bottom Layer "GND_L04_P001" (solid, remove dead copper, pour order 1): 0,0 0,34.5 cw(c1.5,34.5) 1.5,36 31.5,36 cw(c31.5,34.5) 33,34.5 33,0 30.8,0 30.797,-0.002 ccw(c16.5,-9.2) 2.203,-0.002 2.2,0
GND on Top Layer "GND_L01_P000" (solid, remove dead copper, pour order 0): 0,0 0,34.5 cw(c1.5,34.5) 1.5,36 31.5,36 cw(c31.5,34.5) 33,34.5 33,0 30.8,0 30.797,-0.002 ccw(c16.5,-9.2) 2.203,-0.002 2.2,0
GND on Ground (split plane): 198 vertices, not listed, extent 0.509,0.51 32.491,35.491
+5V on Power (split plane): 1.5,35.49 31.5,35.49 31.512,35.491 31.629,35.483 31.757,35.458 31.879,35.416 31.996,35.359 32.104,35.287 32.201,35.201 32.287,35.104 32.359,34.996 32.416,34.879 32.458,34.757 32.483,34.629 32.491,34.512 32.49,34.5 32.49,4.727 30.929,4.727 30.202,5.454 30.202,21.3 30.194,21.365 30.176,21.408 30.168,21.426 30.151,21.449 30.128,21.478 22.352,29.254 22.352,31.375 22.344,31.44 22.318,31.501 22.296,31.531 22.278,31.553 21.028,32.803 20.976,32.843 20.915,32.869 20.85,32.877 14.875,32.877 14.81,32.869 14.749,32.843 14.697,32.803 2.322,20.428 2.282,20.376 2.256,20.315 2.248,20.25 2.248,16.7 2.256,16.635 2.282,16.574 2.322,16.522 4.923,13.921 4.923,3.936 4.53,3.58 4.118,3.182 3.72,2.77 3.335,2.345 2.964,1.908 2.608,1.46 2.267,0.999 1.941,0.528 1.929,0.51 0.51,0.51 0.51,34.5 0.509,34.512 0.517,34.629 0.542,34.757 0.584,34.879 0.641,34.996 0.713,35.104 0.799,35.201 0.896,35.287 1.004,35.359 1.121,35.416 1.243,35.458 1.371,35.483 1.488,35.491
3V3 on Power (split plane): 21.848,31.271 21.848,29.15 21.856,29.085 21.882,29.024 21.922,28.972 29.698,21.196 29.698,5.35 29.706,5.285 29.732,5.224 29.772,5.172 30.647,4.297 30.676,4.274 30.699,4.257 30.717,4.249 30.76,4.231 30.825,4.223 32.49,4.223 32.49,0.51 31.071,0.51 31.059,0.528 30.733,0.999 30.392,1.46 30.036,1.908 29.665,2.345 29.28,2.77 28.882,3.182 28.47,3.58 28.045,3.965 27.773,4.196 27.768,4.224 27.74,4.265 27.699,4.293 27.65,4.302 27.648,4.302 27.608,4.336 27.16,4.692 26.699,5.033 26.228,5.359 25.747,5.67 25.255,5.964 24.754,6.243 24.245,6.505 23.727,6.75 23.201,6.977 22.668,7.188 22.129,7.381 21.583,7.556 21.032,7.714 20.476,7.853 19.916,7.974 19.352,8.076 18.786,8.161 18.216,8.226 17.645,8.273 17.073,8.301 16.5,8.31 15.927,8.301 15.355,8.273 14.784,8.226 14.214,8.161 13.648,8.076 13.084,7.974 12.524,7.853 11.968,7.714 11.417,7.556 10.871,7.381 10.332,7.188 9.799,6.977 9.273,6.75 8.755,6.505 8.246,6.243 7.745,5.964 7.253,5.67 6.772,5.359 6.301,5.033 5.84,4.692 5.427,4.364 5.427,14.025 5.419,14.09 5.393,14.151 5.353,14.203 2.752,16.804 2.752,20.146 14.979,32.373 20.746,32.373

## Keep-outs
Keep-Out Layer:
  lines w0.1: 0.425,36.05 30.425,36.05 ; 1.5,36 ccw(c1.5,34.5) 0,34.5 0,0 2.2,0 ; 2.203,-0.002 cw(c16.5,-9.2) 30.797,-0.002 ; 30.8,0 33,0 33,34.5 ccw(c31.5,34.5) 31.5,36
  lines w0.25: 5.2,14.025 6.825,15.65 11.175,15.65 12.9,17.375 12.9,20.5 ; 21.45,7.2 21.45,20.35
  lines w0.5: 5.175,3.575 5.175,14.025 2.5,16.7 2.5,20.25 14.875,32.625 ; 25.575,31.325 25.575,25.675 29.95,21.3 29.95,1.3

## Other copper
Top Layer:
  rectangle net GND: 0.275,17.025 2.075,20.45
  region net 3V3: 27.425,21.8 28.15,21.8 28.35,21.6 28.35,17.95 28.075,17.675 27.65,17.675 27.425,17.9
Power (plane layer: these items are gaps in the copper):
  lines w0.25: 12.475,36.225 32.975,36.225 33.4,35.8 33.4,-0.05 33.375,-0.025 30.85,-0.025 27.65,3.175 27.65,4.175
  lines w0.5: 5.175,3.575 5.175,14.025 2.5,16.7 2.5,20.25 14.875,32.625 20.85,32.625 22.1,31.375 22.1,29.15 29.95,21.3 29.95,5.35 30.825,4.475 33.1,4.475
Ground (plane layer: these items are gaps in the copper):
  lines w0.25: 5.175,14.025 5.2,14.025 6.825,15.65 11.175,15.65 12.9,17.375 12.9,20.5 ; 21.05,20.75 21.45,20.35 21.45,7.2
  lines w0.5: 5.175,3.575 5.175,14.025 2.5,16.7 2.5,20.25 14.875,32.625 20.85,32.625 ; 25.575,31.325 25.575,25.675 29.95,21.3 29.95,1.175

## Silkscreen, mask and mechanical layers (free items; w line width, h text height)
Top Overlay:
  lines w0.1: 15.625,31.675 15.95,32 15.3,32 15.625,31.675 ; 15.625,31.675 15.625,31.675